# Altium PCB PCB1.PcbDoc
Units mil, origin at the board's own origin, x right, y up, seen from the top; angles counter-clockwise.
Board outline 3900 x 3900 mil, 2 copper layers (Top Layer, Bottom Layer), stack 61.756 mil thick; 49 components, 44 nets, 197 pads, 0 vias.
Unrouted connection lines stored in the file: 141.
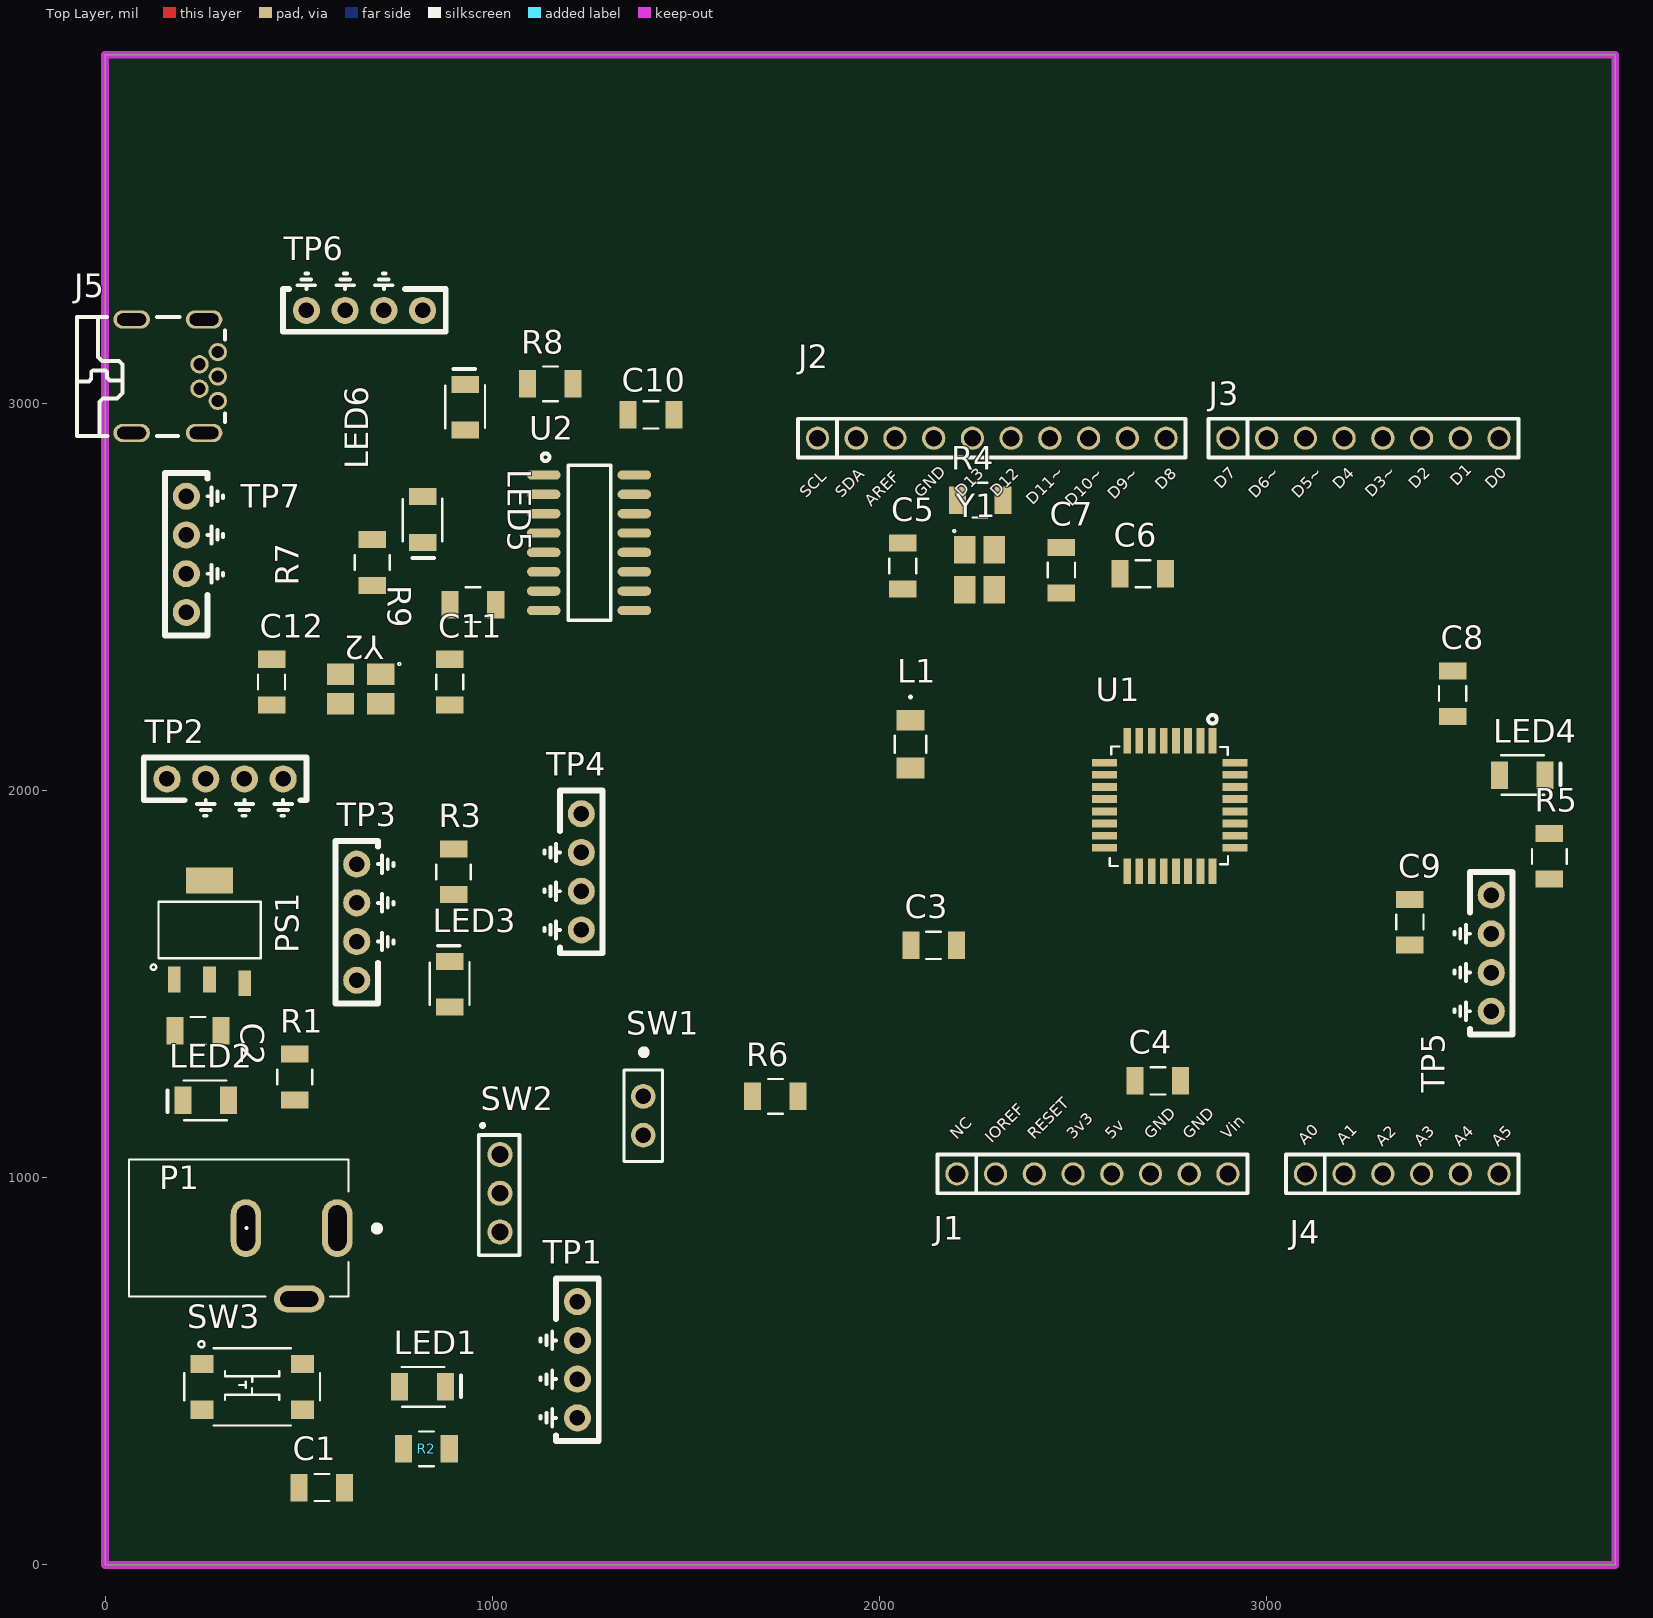
[diagram p0: Top Layer view]
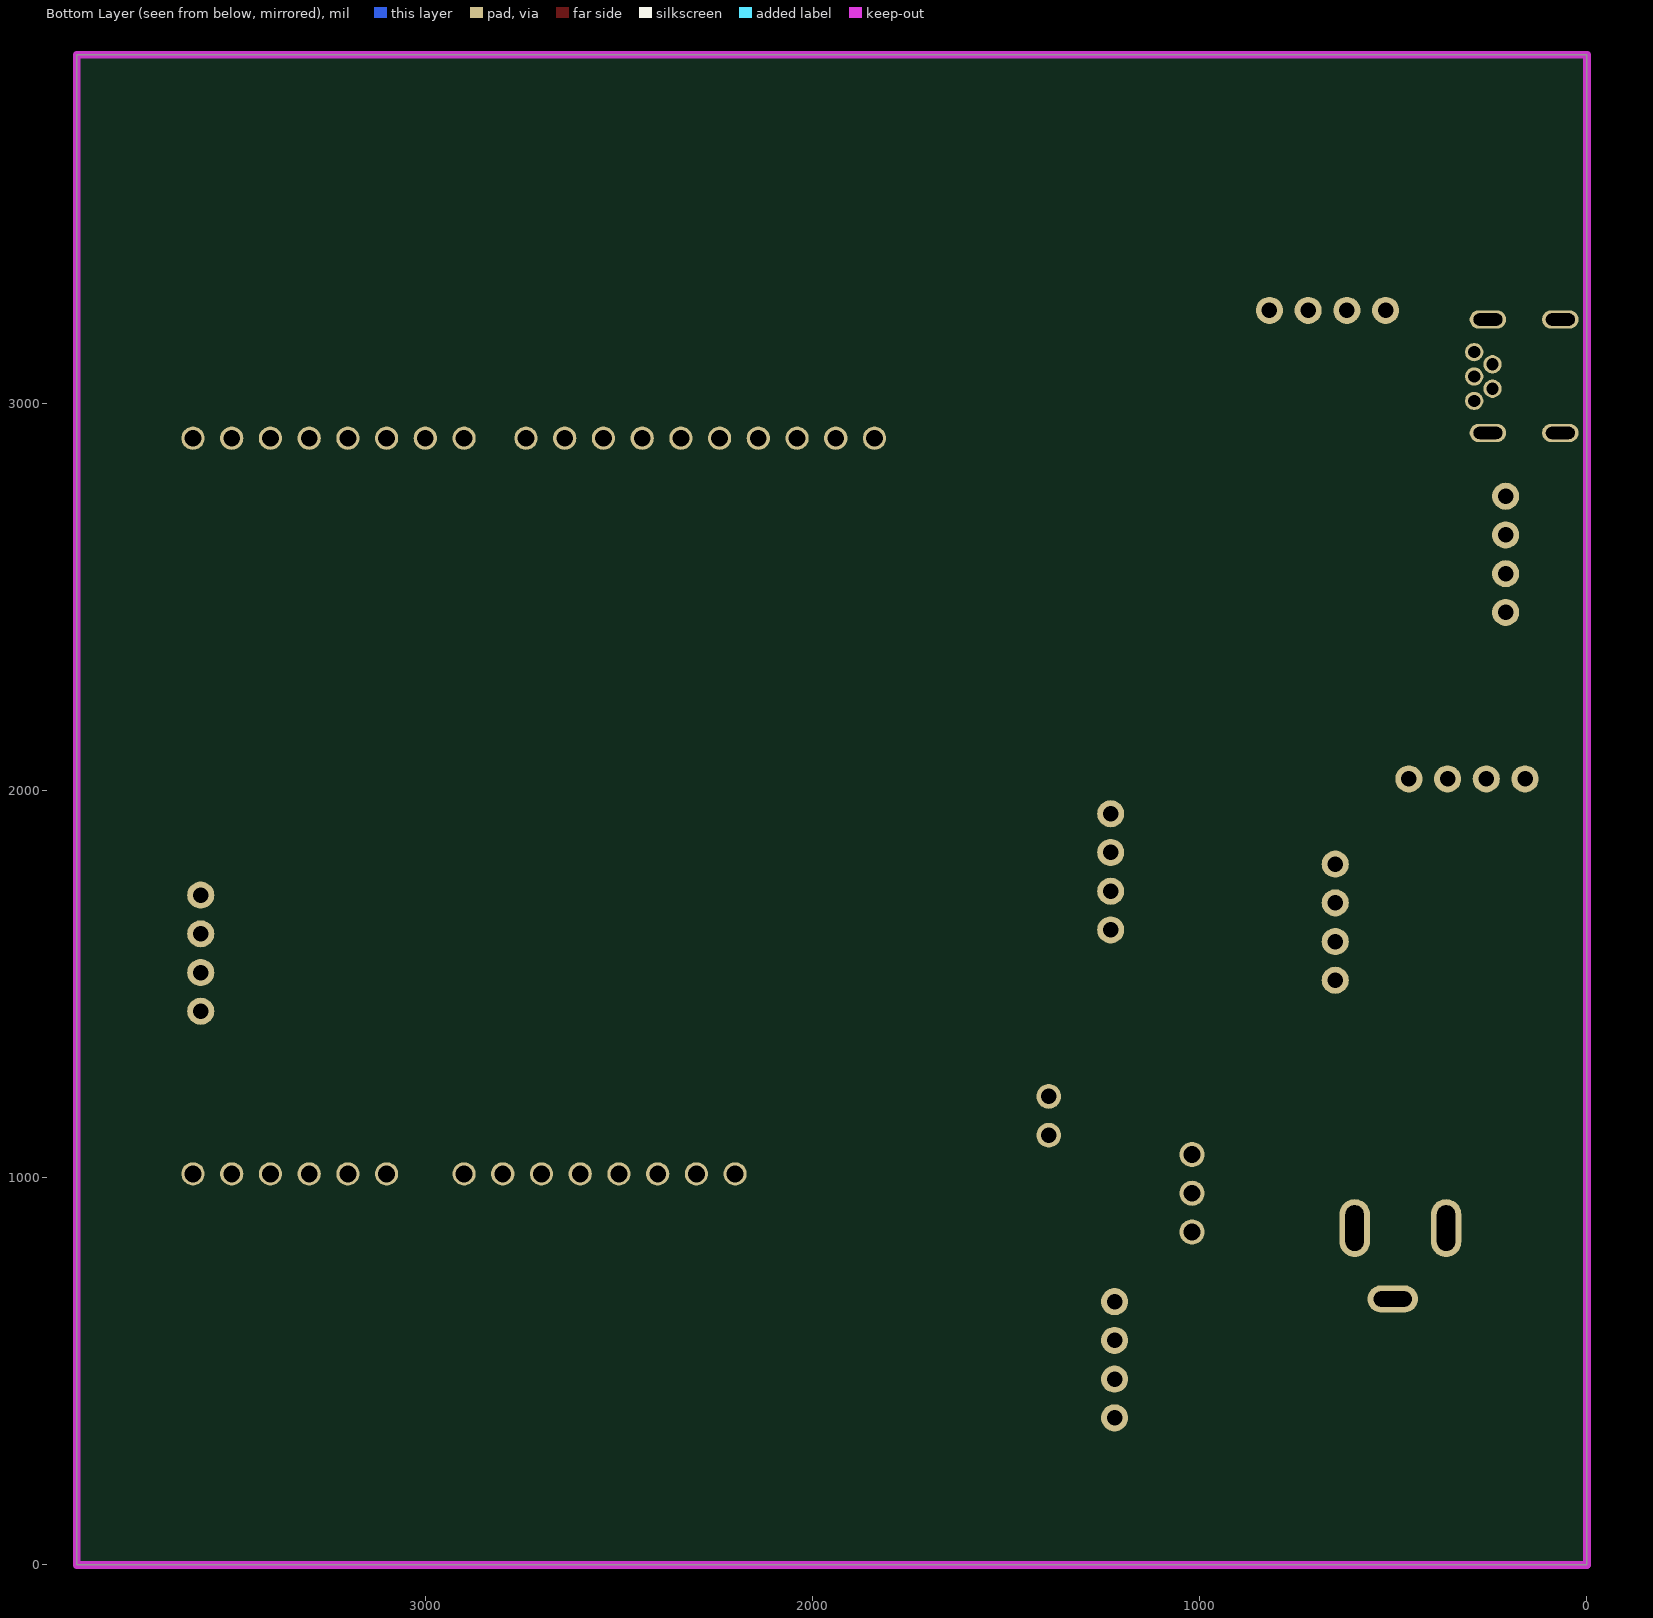
[diagram p1: Bottom Layer view, seen from below]

## Layer stack, top to bottom
Top Solder: solder mask 1, SM-001, Dk 4
Top Layer: signal copper 1.378
Dielectric 1: core 59, Core-043, Dk 4.3
Bottom Layer: signal copper 1.378
Bottom Solder: solder mask 1, SM-001, Dk 4

## Board outline
0,0 3900,0 3900,3900 0,3900 0,1250

## Design rules (kind name [scope] priority, off if disabled: settings)
BoardOutlineClearance [All] p1: gap=10 ignorepadtopadclearanceinfootprint=FALSE except(0: Arc-SplitContinuation Track-SplitContinuation SMDPad-SplitContinuation THPad-SplitContinuation Via-SplitContinuation Fill-SplitContinuation Poly-SplitContinuation Region-SplitContinuation Text-SplitContinuation)
Clearance [All] p1: gap=10 ignorepadtopadclearanceinfootprint=FALSE
PlaneClearance [All] p1: clearance=10
PlaneConnect [All] p1: planeconnectstyle=Direct reliefexpansion=20 reliefentries=4 reliefconductorwidth=10 reliefairgap=10
PolygonConnect [All] p1: thpad.connectstyle=Relief thpad.reliefconductorwidth=10 thpad.reliefentries=4 thpad.polygonreliefangle="90 Angle" thpad.airgapwidth=10 smdpad.connectstyle=Direct smdpad.reliefconductorwidth=10 smdpad.reliefentries=4 smdpad.polygonreliefangle="90 Angle" smdpad.airgapwidth=10 via.connectstyle=Direct via.reliefconductorwidth=10 via.reliefentries=4 via.polygonreliefangle="90 Angle" via.airgapwidth=10
RoutingVias [All] p1: holewidth=13 width=25 viastyle="Through Hole" minholewidth=13 minwidth=25 maxholewidth=60 maxwidth=80
SolderMaskExpansion [All] p1: expansion=4 istentingtop=FALSE
UnRoutedNet [All] p1: checkbadconnections=TRUE
Width "Schematic Width Constraint" [InNet('+5')] p1: maxlimit=100 minlimit=10 preferedwidth=20 minimp=50.000000 maximp=50.000000 favimp=50.000000
Width [All] p2: maxlimit=100 minlimit=6 preferedwidth=6 minimp=50.000000 maximp=50.000000 favimp=50.000000
27 further rules are at their usual default settings.

## Components (designator, comment, footprint, x,y, rotation, side; value= is the part's Value field where it differs from the comment)
C1 "22uF" 1206_Passive_Capacitor 560,200 r0 top
C2 "1uF" 1206_Passive_Capacitor 240,1380 r0 top
C3 "22uF" 1206_Passive_Capacitor 2140,1600 r180 top
C4 "22uF" 1206_Passive_Capacitor 2719,1250 r0 top
C5 "22pF" 1206_Passive_Capacitor 2060,2580 r90 top
C6 "22uF" 1206_Passive_Capacitor 2680,2560 r180 top
C7 "22pF" 1206_Passive_Capacitor 2470,2569 r270 top
C8 "1uF" 1206_Passive_Capacitor 3480,2250 r270 top
C9 "47nF" 1206_Passive_Capacitor 3370,1660 r90 top
C10 "22uF" 1206_Passive_Capacitor 1410,2970 r180 top
C11 "22pF" 1206_Passive_Capacitor 890,2280 r90 top
C12 "22pF" 1206_Passive_Capacitor 430,2280 r270 top
J1 "PPTC081LFBN-RC" 8_PIN_ARD-PWR_100MIL 2200,1010 r0 top value=Female
J2 "PPTC101LFBN-RC" 10_PIN_ARDUINO_100MIL 1840,2910 r0 top value=Female
J3 "PPTC081LFBN-RC" 8_PIN_ARD-DIG_100MIL 2900,2910 r0 top value=Female
J4 "PPTC061LFBN-RC" 6_PIN_ARD-Analog_100mil 3100,1010 r0 top value=Female
J5 "USB Mini" USB_MINI_B 180,3070 r270 top value="USB mini B"
L1 "FB_10uH_1206" AIML-1206_ABR-M 2080,2120 r270 top
LED1 "Red" LED_1206 820,460 r0 top
LED2 "Red" LED_1206 260,1200 r180 top
LED3 "Red" LED_1206 890,1500 r90 top
LED4 "Red" LED_1206 3660,2040 r0 top
LED5 "Red" LED_1206 820,2700 r270 top
LED6 "Red" LED_1206 930,2990 r90 top
P1 "Power Jack" Power_Jack 600,870 r180 top value="CONN PWR JACK 2X5.5MM SOLDER"
PS1 "AMS1117-3.3" LDO 270,1640 r0 top value="IC REG LINEAR 3.3V 800MA SOT223"
R1 "1k" 1206_Passive_Resitor 490,1260 r90 top value="1K Ohm"
R2 "1k" 1206_Passive_Resitor 830,300 r0 top value="1K Ohm"
R3 "1k" 1206_Passive_Resitor 900,1790 r270 top value="1K Ohm"
R4 "1M" 1206_Passive_Resitor 2260,2750 r180 top value="1M Ohm"
R5 "1k" 1206_Passive_Resitor 3730,1830 r90 top value="1K Ohm"
R6 "10k" 1206_Passive_Resitor 1731,1210 r0 top value=10KOhm
R7 "1k" 1206_Passive_Resitor 690,2589 r90 top value="1K Ohm"
R8 "1k" 1206_Passive_Resitor 1150,3050 r180 top value="1K Ohm"
R9 "1M" 1206_Passive_Resitor 950,2480 r180 top value="1M Ohm"
SW1 "led_on_off_sw" 2Pin-Header-Conn 1390,1210 r270 top
SW2 "PREC003SAAN-RC" 3_PIN_100mil 1020,1060 r270 top value="CONN HEADER VERT 3POS 2.54MM"
SW3 "TL3305AF160QG" Switch_JLC 380,460 r0 top
TP1 "5v TP" TP10x_Probe 1220,530 r270 top
TP2 "3.3v tp" TP10x_Probe 310,2030 r0 top
TP3 "rg5vtp" TP10x_Probe 650,1660 r90 top
TP4 "atmegaXTALtp" TP10x_Probe 1230,1790 r270 top
TP5 "resettp" TP10x_Probe 3580,1580 r270 top
TP6 "rxtp" TP10x_Probe 670,3240 r180 top
TP7 "txtp" TP10x_Probe 210,2610 r90 top
U1 "ATMEGA328P-ANR" ATMega328P 2750,1960 r90 top value="IC MCU 8BIT 32KB FLASH 32TQFP"
U2 "CH340G" "USB to serial" 1250,2640 r270 top value="USB to Serial"
Y1 "X322516MLB4SI" "Crystal resonator" 2260,2570 r270 top value=16MHz
Y2 "X322512MSB4SI" "Crystal resonator" 660,2260 r180 top value=12MHz

## Footprints (in the part's own frame and the unit in brackets; to place one, negate y for a bottom-side part, rotate by r counter-clockwise, add the part's x,y. Pads: shape width x height; smd on the part's side, far side on the other; paste and mask are expansions set on the pad)
2Pin-Header-Conn [mm]
  round 1.62 hole 1.02: 1(0,0) 2(2.54,0)
  silkscreen extent -3.03,-1.27 4.26,1.26, body extent -1.27,-1.27 3.81,1.27, height 8.13
3_PIN_100mil [mm]
  round 1.65 hole 1.1: 1(0,0) 2(2.54,0) 3(5.08,0)
  silkscreen extent -2,-1.4 6.6,1.27, body extent -1.14,-1.27 6.48,1.27, height 8.38
6_PIN_ARD-Analog_100mil [mil]
  round 60 hole 43.31: 1(0,0) 2(100,0) 3(200,0) 4(300,0) 5(400,0) 6(500,0)
  silkscreen extent -50,-50 550,50, body extent -59,-49 561,51, height 335
8_PIN_ARD-DIG_100MIL [mil]
  round 60 hole 43.31: 1(0,0) 2(100,0) 3(200,0) 4(300,0) 5(400,0) 6(500,0) 7(600,0) 8(700,0)
  silkscreen extent -50,-50 750,50, body extent -60,-50 760,50, height 335
8_PIN_ARD-PWR_100MIL [mil]
  round 60 hole 43.31: 1(0,0) 2(100,0) 3(200,0) 4(300,0) 5(400,0) 6(500,0) 7(600,0) 8(700,0)
  silkscreen extent -50,-50 750,50, body extent -60,-50 760,50, height 335
10_PIN_ARDUINO_100MIL [mil]
  round 60 hole 43.31: 1(0,0) 2(100,0) 3(200,0) 4(300,0) 5(400,0) 6(500,0) 7(600,0) 8(700,0) 9(800,0) 10(900,0)
  silkscreen extent -50,-50 950,50, body extent -60,-49 960,51, height 335
1206_Passive_Capacitor [mil]
  rect 44x71 smd: 1(-59,0) 2(59,0)
  silkscreen extent -19,-35 19,35, body extent -63,-31 63,32, height 50
1206_Passive_Resitor [mil]
  rect 44x71 smd: 1(-59,0) 2(59,0)
  silkscreen extent -19,-45 19,45, body extent -61,-31 61,31, height 26
AIML-1206_ABR-M [mil]
  rect 54x73 smd paste+0 mask+0: 1(-61.5,0) 2(61.5,0)
  silkscreen extent -124,-41 22,41, body extent -66,-36 66,36, height 55
ATMega328P [mm]
  rect 1.65x0.508 smd mask+0.025: 1(4.28,-2.794) 2(4.28,-2.007) 3(4.28,-1.194) 4(4.28,-0.406) 5(4.28,0.406) 6(4.28,1.194) 7(4.28,2.007) 8(4.28,2.794) 17(-4.28,2.794) 18(-4.28,2.007) 19(-4.28,1.194) 20(-4.28,0.406) 21(-4.28,-0.406) 22(-4.28,-1.194) 23(-4.28,-2.007) 24(-4.28,-2.794)
  rect 0.508x1.65 smd mask+0.025: 9(2.843,4.28) 10(2.056,4.28) 11(1.243,4.28) 12(0.455,4.28) 13(-0.357,4.28) 14(-1.145,4.28) 15(-1.958,4.28) 16(-2.745,4.28) 25(-2.745,-4.28) 26(-1.958,-4.28) 27(-1.145,-4.28) 28(-0.357,-4.28) 29(0.455,-4.28) 30(1.243,-4.28) 31(2.056,-4.28) 32(2.843,-4.28)
  silkscreen extent -3.94,-3.81 5.97,3.94, body extent -4.45,-4.47 4.55,4.53, height 1.16
"Crystal resonator" [mm]
  rect 1.8x1.4 smd: 1(-1.32,-1.02) 2(1.32,-1.02) 3(1.32,0.92) 4(-1.32,0.92)
  silkscreen extent -2.63,-1.79 -2.45,-1.61, body extent -1.65,-1.2 1.65,1.2, height 0.8
LDO [mm]
  rect 0.838x1.7 smd: 1(-2.311,-3.25) 2(0,-3.25) 3(2.311,-3.5)
  rect 3.099x1.7 smd: 4(0,3.25)
  silkscreen extent -3.86,-2.62 3.35,1.85, body extent -3.25,-3.65 3.25,3.35, height 1.85
LED_1206 [mil]
  rect 44x71 smd: 1(-59,0) 2(59,0)
  silkscreen extent -54,-51 99,51, body extent -63,-31 63,31, height 28
Power_Jack [mm]
  oval 2x3.8 hole 1.2 slot 3 at 90 deg: 1(0,0) 2(6,0)
  oval 3.3x1.8 hole 1 slot 2.5 at 0 deg: 3(2.5,4.65)
  silkscreen extent -2.79,-4.5 13.68,4.5, body extent -0.76,-4.45 13.64,4.95, height 11.49
Switch_JLC [mm]
  rect 1.5x1.2 smd: 1(-3.3,1.5) 2(3.3,1.5) 3(-3.3,-1.5) 4(3.3,-1.5)
  silkscreen extent -4.44,-2.54 4.45,3, body extent -3.8,-2.29 3.7,2.21, height 3.7
TP10x_Probe [mil] "Small Probs footprint"
  round 70 hole 40: 1(-150,0) 2(-50,0) 2(50,0) 2(150,0)
  silkscreen extent -210,-95 210,55
"USB to serial" [mil]
  oval 24x86.61 smd: 1(-175,-117) 2(-125,-117) 3(-75,-117) 4(-25,-117) 5(25,-117) 6(75,-117) 7(125,-117) 8(175,-117) 9(175,117) 10(125,117) 11(75,117) 12(25,117) 13(-25,117) 14(-75,117) 15(-125,117) 16(-175,117)
  silkscreen extent -231,-122 201,56, body extent -197,-118 197,118, height 71
USB_MINI_B [mm]
  round 1.2 hole 0.8: 1(-1.58,2.826) 2(-0.78,1.622) 3(0.02,2.826) 4(0.82,1.622) 5(1.62,2.826)
  oval 1.2x2.4 hole 0.8 slot 1.9 at 90 deg: 6(-3.72,1.924) 7(3.72,1.924) 8(-3.72,-2.826) 9(3.72,-2.826)
  silkscreen extent -3.89,-6.42 3.93,3.3, body extent -4.04,-6.83 4.06,3.02, height 3.98

## Part data
C1 C3 C4 C6 C10: library part C_22uF_1206, "22uF ±10% 25V X5R 1206 Multilayer Ceramic Capacitors MLCC - SMD/SMT RoHS", LCSC Part#=C12891, MFR Part #=CL31A226KAHNNNE, Datasheet=https://datasheet.lcsc.com/lcsc/1811031514_Samsung-Electro-Mechanics-CL31A226KAHNNNE_C12891.pdf, Type=basic
C2 C8: library part C_1uF_1206, "MULTILAYER CERAMIC CAPACITORS MLCC - SMD/SMT 1UF 50V 1206 ROHS", LCSC Part#=C1848, MFR Part #=CL31B105KBHNNNE, Digikey Link=https://www.digikey.com/product-detail/en/C1206C105M4RACTU/399-8150-1-ND/3471873/?itemSeq=304982366, Type=Basic
C5 C7 C11 C12: library part C_22pF_1206, "22pF ±5% 1kV C0G 1206 Multilayer Ceramic Capacitors MLCC - SMD/SMT RoHS", LCSC Part#=C107174, MFR Part #=CC1206JKNPOCBN220, Datasheet=https://datasheet.lcsc.com/lcsc/1810241219_YAGEO-CC1206JKNPOCBN220_C107174.pdf, Type=Extended
C9: library part C_47nF_1206, "47nF ±5% 50V C0G 1206 Multilayer Ceramic Capacitors MLCC - SMD/SMT RoHS", LCSC Part#=C21812, MFR Part #=GRM31M5C1H473JA01L, Datasheet=https://datasheet.lcsc.com/lcsc/1810201313_Murata-Electronics-GRM31M5C1H473JA01L_C21812.pdf, Type=Extended
J1: library part JF_8_PIN_FEMA_ARD-Pwr, "8 Position Header Connector 0.100\" (2.54mm) Through Hole Tin", LCSC Part#=C27438, Digikey Link=https://www.digikey.com/product-detail/en/PPTC081LFBN-RC/S7006-ND/810147/?itemSeq=304982354, MFR Part #=PPTC081LFBN-RC, Type=Extended
J2: library part JF_10_PIN_FEMA_ARDUINO, "10 Position Header Connector 0.100\" (2.54mm) Through Hole Tin", LCSC Part#=C225507, Digikey Link=https://www.digikey.com/product-detail/en/PPTC101LFBN-RC/S7008-ND/810149/?itemSeq=304982352, MFR Part #=PPTC101LFBN-RC, Type=Extended
J3: library part JF_8_PIN_FEMA_ARD-Dig, "8 Position Header Connector 0.100\" (2.54mm) Through Hole Tin", LCSC Part#=C27438, Digikey Link=https://www.digikey.com/product-detail/en/PPTC081LFBN-RC/S7006-ND/810147/?itemSeq=304982354, MFR Part #=PPTC081LFBN-RC, Type=Extended
J4: library part JF_6_PIN_FEMA_ARD-Anolog, "6 Position Header Connector 0.100\" (2.54mm) Through Hole Tin", LCSC Part#=C40877, Digikey Link=https://www.digikey.com/product-detail/en/PPTC061LFBN-RC/S7004-ND/810145/?itemSeq=304982353, MFR Part #=PPTC061LFBN-RC, Type=Extended
J5: library part J_USB_B_Mini, "Through Hole USB Connectors RoHS", LCSC Part#=C46398, MFR Part #=920-462A2021D10102, Datasheet=https://datasheet.lcsc.com/szlcsc/2103081233_Jing-Extension-of-the-Electronic-Co-920-462A2021D10102_C46398.pdf, Type=Extended
L1: "25mA 10uH ±10% 800mΩ 1206  Inductors (SMD) ROHS", LCSC Part#=C1051, MFR Part #=CMI321609X100KT, Mfr_Name="FH (Guangdong Fenghua Advanced Tech)", Datasheet=https://datasheet.lcsc.com/lcsc/1810311314_FH--Guangdong-Fenghua-Advanced-Tech-CMI321609X100KT_C1051.pdf, Type=Basic
LED1 LED2 LED3 LED4 LED5 LED6: library part LED_RED_1206, "Red 621~631nm 1206 Light Emitting Diodes (LED) RoHS", LCSC Part#=C93133, MFR Part #=15-21/R6C-FQ1R1B/2T, Datasheet=https://datasheet.lcsc.com/szlcsc/1811151241_Everlight-Elec-15-21-R6C-FQ1R1B-2T_C93133.pdf, Type=Extended
P1: library part "P_Power Jack", "Power Barrel Connector Jack 2.10mm ID (0.083\"), 5.50mm OD (0.217\") Through Hole, Right Angle", LCSC Part#=C136744, MFR Part #=PJ-102A, Digikey Link=https://www.digikey.com/product-detail/en/PJ-102A/CP-102A-ND/275425/?itemSeq=304982367, Type=Extended
PS1: library part PS_AMS_LDO_3v3, "LOW DROPOUT REGULATORS(LDO) POSITIVE FIXED 1.3V @ 800MA 15V 3.3V 1A SOT-223 ROHS", LCSC Part#=C6186, MFR Part #=AMS1117-3.3, Type=Basic
R1 R2 R3 R5 R7 R8: library part R_1K_1206, "CHIP RESISTOR - SURFACE MOUNT 1KOHMS ±1% 1/4W 1206 ROHS", LCSC Part#=C4410, MFR Part #=RNCP1206FTD1K00CT, Digikey Link=https://www.digikey.com/product-detail/en/RNCP1206FTD1K00/RNCP1206FTD1K00CT-ND/2240675/?itemSeq=304982373, Type=Basic
R4 R9: library part R_1M_1206, "CHIP RESISTOR - SURFACE MOUNT 1MOHMS ±1% 1/4W 1206 ROHS", LCSC Part#=C17927, MFR Part #=RMCF1206JT1M00, Digikey Link=https://www.digikey.com/product-detail/en/RMCF1206JT1M00/RMCF1206JT1M00CT-ND/1942830/?itemSeq=304982358, Type=Basic
R6: library part R_10KOhm_1206, "10 kOhms ±5% 0.25W, 1/4W Chip Resistor 1206 (3216 Metric) Automotive AEC-Q200 Thick Film", LCSC Part#=C17902, MFR Part #=RMCF1206FT10K0, Digikey Link=https://www.digikey.com/en/products/detail/stackpole-electronics-inc/RMCF1206FT10K0/1759669, Type=Basic
SW1: library part SW_2Pin_100mil_Switch, "2Pin Header", LCSC Part#=C124375, Type=Extended
SW2: library part SW_3Pin_100mil_Switch, "Connector Header Through Hole 3 position 0.100\" (2.54mm)", LCSC Part#=C49257, Digikey Link=https://www.digikey.com/product-detail/en/PREC003SAAN-RC/S1012EC-03-ND/2774851/?itemSeq=304982371, MFR Part #=PREC003SAAN-RC, Type=Extended
SW3: library part SW_Push_Button_JLC, "Tactile Switch SPST-NO Top Actuated Surface Mount", LCSC Part#=C2837550, MFR Part #=KH-4.5X4.5X4.3H-STM, Datasheet=https://datasheet.lcsc.com/lcsc/2106081532_Shenzhen-Kinghelm-Elec-KH-4.5X4.5X4.3H-STM_C2837550.pdf, Type=Extended
TP1 TP2 TP3 TP4 TP5 TP6 TP7: library part TP_10x_Probe, "Test Point 300 mil centers"
U1: library part U_ATMega328P, "AVR AVR® ATmega Microcontroller IC 8-Bit 20MHz 32KB (16K x 16) FLASH 32-TQFP (7x7)", LCSC Part#=C14877, MFR Part #=ATMEGA328P-AU, Digikey Link=https://www.digikey.com/product-detail/en/ATMEGA328P-ANR/ATMEGA328P-ANRCT-ND/2774230/?itemSeq=304982365, Type=Basic
U2: library part U_USBtoSerial, "Transceiver USB 2.0 2Mbps SOP-16_150mil USB ICs RoHS", LCSC Part#=C14267, Datasheet=https://datasheet.lcsc.com/lcsc/2008191806_WCH-Jiangsu-Qin-Heng-CH340G_C14267.pdf, MFR Part #=CH340G, Type=Basic
Y1: library part X_16Mhz_Res, "±10ppm 16000000Hz -40℃~85℃ 贴片无源晶振 60Ω 9pF SMD3225-4P Crystals ROHS", LCSC Part#=C13738, MFR Part #=X322516MLB4SI, Type=Basic
Y2: library part X_12MHz_Res, "SMD Crystal Resonators 12MHz ±10ppm SMD-3225_4P RoHS", LCSC Part#=C9002, Datasheet=https://datasheet.lcsc.com/szlcsc/Yangxing-Tech-X322512MSB4SI_C9002.pdf, MFR Part #=X322512MSB4SI, Type=Basic

## Nets (pads, with @x,y where several pads share a name; then routed paths per layer and width w, separated by ;. In a path a pad name is that pad's centre, name@x,y a point inside that pad or via, vN(x,y) a via of type N, cw(c..) or ccw(c..) an arc to the next point about the centre after c; other vN are vias at no path point)
3v: C2.2 J1.4 PS1.2 PS1.4 R1.2 TP2.1
+5: C1.2 C10.1 J1.5 LED1.1 P1.1 PS1.3 SW2.3 TP1.1 U2.16
dtr: C8.1 U2.13
GND: C1.1 C2.1 C3.2 C4.2 C5.1 C6.1 C7.1 C9.1 C10.2 C11.1 C12.1 J1.6 J1.7 J2.4 J5.5 J5.6 J5.7 J5.8 J5.9 LED2.2 P1.2 P1.3 PS1.1 R2.1 R3.1 R5.1 SW3.1 SW3.2 TP1.2 TP2.2 TP3.2 TP4.2 TP5.2 TP6.2 TP7.2 U1.3 U1.5 U1.21 U2.1 Y1.2 Y1.4 Y2.2 Y2.4
NetC3_1: C3.1 L1.2 U1.18
NetC4_1: C4.1 J2.3 U1.20
NetC5_2: C5.2 R4.2 U1.7 Y1.1
NetC7_2: C7.2 R4.1 TP4.1 U1.8 Y1.3
NetC11_2: C11.2 R9.2 U2.7 Y2.1
NetC12_2: C12.2 R9.1 U2.8 Y2.3
NetD1_1: LED6.1 U2.2
NetD1_4: LED5.1 U2.3
NetJ2_1: J2.1 J4.5 U1.27
NetJ2_2: J2.2 J4.6 U1.28
NetJ2_5: J2.5 U1.12
NetJ2_6: J2.6 U1.13
NetJ2_7: J2.7 U1.14
NetJ2_8: J2.8 U1.15
NetJ2_9: J2.9 U1.16
NetJ2_10: J2.10 U1.17
NetJ3_3: J3.3 U1.32
NetJ3_4: J3.4 U1.1
NetJ3_5: J3.5 U1.2
NetJ3_6: J3.6 U1.9
NetJ3_7: J3.7 U1.10
NetJ3_8: J3.8 U1.11
NetJ4_1: J4.1 U1.23
NetJ4_2: J4.2 U1.24
NetJ4_3: J4.3 U1.25
NetJ4_4: J4.4 U1.26
NetJ5_2: J5.2 U2.6
NetJ5_3: J5.3 U2.5
NetLED1_2: LED1.2 R2.2
NetLED2_1: LED2.1 R1.1
NetLED3_2: LED3.2 R3.2
NetLED4_2: LED4.2 R5.2
NetLED5_2: LED5.2 R7.2
NetLED6_2: LED6.2 R8.2
reset: C8.2 C9.2 J1.3 LED4.1 R6.2 SW3.3 SW3.4 TP5.1 U1.29
rg5v: LED3.1 SW1.2 SW2.2 TP3.1
rg5vsw: C6.2 J1.8 L1.1 R6.1 SW1.1 U1.4 U1.6
rxled: J3.1 R8.1 TP6.1 U1.30
txled: J3.2 R7.1 TP7.1 U1.31
usb5v: J5.1 SW2.1
pads on no net: J1.1 J1.2 J5.4 U1.19 U1.22 U2.4 U2.9 U2.10 U2.11 U2.12 U2.14 U2.15

## Keep-outs
Keep-Out Layer:
  the board outline again, w20

## Silkscreen, mask and mechanical layers (free items; w line width, h text height)
Top Overlay:
  text "Gavin Unrue" at 760,-220 h40
  text "ECEN5730_brd3a_10-18-2024" at 680,-353.34 h40
  text "ECEN 5730 Arduino brd" at 790,-500 h40

## Text inside footprints (layer, text, board x,y; h text height)
J1: Top Overlay "RESET" at 2400,1097.07 h30 r45; Top Overlay "Vin" at 2900,1097.07 h30 r45; Top Overlay "GND" at 2800,1097.07 h30 r45; Top Overlay "GND" at 2700,1097.07 h30 r45; Top Overlay "5v" at 2600,1097.07 h30 r45; Top Overlay "3v3" at 2500,1097.07 h30 r45; Top Overlay "IOREF" at 2290,1088.39 h30 r45; Top Overlay "NC" at 2200,1097.07 h30 r45
J2: Top Overlay "SCL" at 1811,2753.21 h30 r45; Top Overlay "SDA" at 1903,2753.21 h30 r45; Top Overlay "AREF" at 1979,2732 h30 r45; Top Overlay "GND" at 2106,2753.21 h30 r45; Top Overlay "D13" at 2212,2756.74 h30 r45; Top Overlay "D12" at 2303,2756.74 h30 r45; Top Overlay "D11~" at 2396,2735.53 h30 r45; Top Overlay "D10~" at 2497,2732 h30 r45; Top Overlay "D9~" at 2606,2749.67 h30 r45; Top Overlay "D8" at 2729,2774.41 h30 r45
J3: Top Overlay "D7" at 2881,2776.81 h30 r45; Top Overlay "D6~" at 2971,2752.07 h30 r45; Top Overlay "D4" at 3187,2775 h30 r45; Top Overlay "D3~" at 3271,2755 h30 r45; Top Overlay "D2" at 3384,2777 h30 r45; Top Overlay "D1" at 3491,2785 h30 r45; Top Overlay "D0" at 3581,2776.81 h30 r45; Top Overlay "D5~" at 3081,2752.07 h30 r45
J4: Top Overlay "A5" at 3598,1079.07 h30 r45; Top Overlay "A4" at 3498,1079.07 h30 r45; Top Overlay "A3" at 3398,1079.07 h30 r45; Top Overlay "A2" at 3298,1079.07 h30 r45; Top Overlay "A0" at 3098,1082 h30 r45; Top Overlay "A1" at 3198,1082 h30 r45